# EAGLE board attinydevboard (EAGLE 9.6.2)
VERSION: 1.0b0
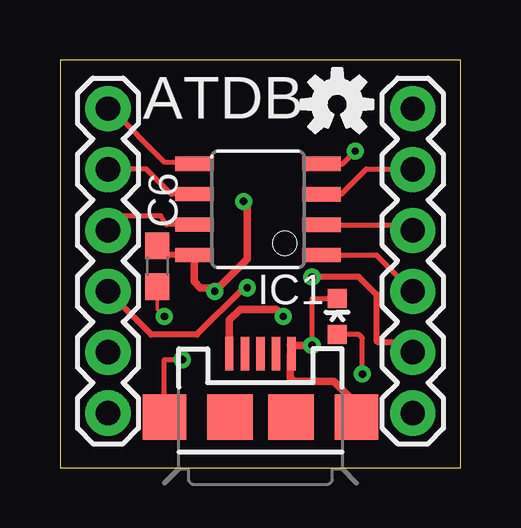
[diagram p0: board, top side]
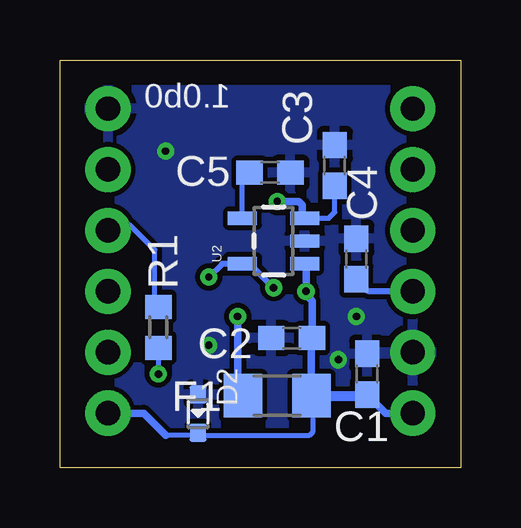
[diagram p1: board, bottom side, seen from below]

Size 16.7 x 17 mm. Coordinates in mm from the lower left corner, seen from the top.
Outline: 0,0 16.7,0 16.7,17 0,17 0,0
Copper layers (1*16): Top 0.035mm / dielectric 1.5mm / Bottom 0.035mm
Design rules "default *": minimum track width 10mil, minimum drill 24mil, track to track 8mil, track to pad 8mil, pad to pad 8mil, via to via 8mil, smd to smd 8mil, copper to edge 40mil, drill to drill 8mil, minimum pad ring 10mil, minimum via ring 8mil, stop-mask expansion 4mil, vias tented up to drill 13mil, thermal gap 10mil

## Footprints (pad centres in the part's own frame; a part is rotated, then mirrored left to right if it is on the bottom)
C0603 = smd 1.1 x 1: 1 -0.85,0; 2 0.85,0
SOD-523 = smd 0.762 x 0.7: + -0.8,0; - 0.8,0
R1206 = smd 1.6 x 1.803: 1 -1.422,0; 2 1.422,0
8S1 = smd 0.6 x 1.6: 1 -1.905,-2.654; 2 -0.645,-2.654; 3 0.625,-2.654; 4 1.895,-2.654; 5 1.905,2.654; 6 0.635,2.654; 7 -0.635,2.654; 8 -1.905,2.654
USB-MICROB = smd 0.35 x 1.4: D+ 0,2.65; D- -0.65,2.65; GND 1.3,2.65; ID 0.65,2.65; VBUS -1.3,2.65 | smd 1.8 x 1.9: MT1 -4,0; MT2 4,0 | smd 1.9 x 1.9: P$1 -1.27,0; P$2 1.27,0
1X06 = drill 1.016 pad 1.88: 1 0,0; 2 2.54,0; 3 5.08,0; 4 7.62,0; 5 10.16,0; 6 12.7,0
LED-0603 = smd 0.8 x 0.8: A 0,-0.75; C 0,0.75
R0603 = smd 1 x 1.1: 1 -0.85,0; 2 0.85,0
SOT23-5 = smd 0.55 x 1.2: 1 -0.95,-1.3; 2 0,-1.3; 3 0.95,-1.3; 4 0.95,1.3; 5 -0.95,1.3

## Placement (x,y rotation side)
C1  10uF  [C0603]  3.9,3.9 90 bottom
C2  100uF  [C0603]  7.05,5.4 180 bottom
C3  10uF  [C0603]  5.25,12.6 90 bottom
C4  10uF  [C0603]  4.35,8.7 90 bottom
C5  10uF  [C0603]  7.95,12.3 0 bottom
C6  10uF  [C0603]  4.05,8.4 270 top
D2  3.6V-150MW  [SOD-523]  10.95,2.25 270 bottom
F1  [R1206]  7.65,3 0 bottom
IC1  TINY13-20SSU  [8S1]  8.25,10.77 90 top
J1  USB-MICROB  [USB-MICROB]  8.35,2.1 0 top
J2  [1X06]  2,2.27 90 top
J3  [1X06]  14.7,2.27 90 top
LED1  [LED-0603]  11.55,6.3 0 top
R1  1K  [R0603]  12.6,5.85 270 bottom
U2  V_REG_LDOSMD  [SOT23-5]  7.8,9.45 90 bottom
U$2  OSHW-LOGOS  [OSHW-LOGO-S]  11.55,15.15 0 top

## Library data of the parts
C1-C6 = resistor
D2 = Seeed-OPL-Diode; MPN: BZX584C3V6
F1 R1 = adafruit
IC1 = atmel; MPN: ATTINY13-20SSU; OC_FARNELL: 1455133; OC_NEWARK: 58M3771
J1 = SparkFun-Connectors; PROD_ID: CONN-09505
J2 J3 LED1 U2 U$2 = SparkFun

## Nets
3.3V: C4.1 J2.3 J3.2 U2.5
5V: C1.1 C2.1 C3.1 C6.1 D2.- F1.2 IC1.8 J2.1 J3.1 U2.1 U2.3
ADC2: IC1.3 J3.5
ADC3: IC1.2 J3.4 R1.1
GND: C1.2 C2.2 C3.2 C4.2 C5.2 C6.2 D2.+ IC1.4 J1.GND J1.MT1 J1.MT2 J2.2 J3.6 LED1.C U2.2
MISO: IC1.6 J2.5
MOSI: IC1.5 J2.6
N$1: LED1.A R1.2
N$5: F1.1 J1.VBUS
N$12: C5.1 U2.4
RES: IC1.1 J3.3
SCK: IC1.7 J2.4

## Tracks (layer width: path | path; a pad name or v marks a point on that pad's centre or on a via)
3.3V  (via drill 0.3)
  Top 0.205: v7.8,7.5 7.65,7.5 | 2.15,7.2 J2.3
  Top 0.254: J3.2 14.06,5.25 13.2,5.25 13.2,7.2 12.45,7.95 v10.5,7.95 | 7.65,7.5 5.7,5.55 3.8,5.55 J2.3
  Bottom 0.205: U2.5 8.8,8.5
  Bottom 0.254: J2.3 3.85,7.35 C4.1 | U2.5 9.95,8.5 v10.5,7.95 | 8.8,8.5 v7.8,7.5
5V  (via drill 0.3)
  Top 0.205: 6.3,7.5 v6.45,7.35 | 7.8,10.95 v7.65,11.1
  Top 0.254: IC1.8 4.05,8.87 C6.1
  Top 0.305: IC1.8 5.6,7.75 5.85,7.5 6.3,7.5 | 7.8,10.95 7.8,8.7 v6.45,7.35
  Bottom 0.152: D2.- 10.95,1.35
  Bottom 0.205: 3.95,3 C1.1 | 6.23,5.37 C2.1 | 12.3,1.35 10.95,1.35 6.3,1.35 6.15,1.5 6.15,2.92 F1.2 | 6.45,8.45 U2.1 | C3.1 5.25,10.65 5.5,10.4 U2.3 6.6,10.5
  Bottom 0.305: J2.1 3.12,2.27 C1.1 | F1.2 6.23,5.37 | J3.1 13.22,2.27 12.3,1.35 | C2.1 6.2,6.95 6.45,7.2 v6.45,7.35 6.45,8.45 | v7.65,11.1 6.75,11.1 6.6,10.95 6.6,10.5
  Bottom 0.406: F1.2 3.95,3
ADC2
  Top 0.205: IC1.3 11.7,11.39 12.75,12.45 14.48,12.45 J3.5
ADC3
  Top 0.205: IC1.2 14.27,10.12 J3.4
  Bottom 0.205: R1.1 12.75,6.7 12.75,9.07 13.8,10.12 14.46,10.12 J3.4
GND  (via drill 0.3)
  Top 0.152: C6.2 4.05,6.6 v4.35,6.3
  Top 0.205: IC1.4 11.77,12.66 v12.3,13.2 | v5.1,4.5 4.35,4.5 J1.MT1 | 9.6,4.7 J1.GND 9.6,4.8 9.6,5.1 | v10.5,5.1 10.5,7.05 LED1.C
  Top 0.305: J1.MT2 12.25,2.75 11.4,3.6 9.75,3.6 9.6,3.75 9.6,4.7 | v10.5,5.1 9.6,5.1
  pour Bottom: -0.3,21.3 -0.3,-0.6 18.9,-0.6 18.9,22.5 -0.3,22.5
MISO
  Top 0.205: IC1.6 4.64,11.4 3.6,12.45 2.02,12.45 J2.5
MOSI
  Top 0.205: J2.6 2.13,14.97 4.35,12.75 5.52,12.75 IC1.5
N$1  (via drill 0.3)
  Top 0.205: v12.6,3.9 12.6,5.4 12.45,5.55 LED1.A
  Bottom 0.205: R1.2 v12.6,3.9
N$5  (via drill 0.3)
  Top 0.305: v9.3,6.3 9,6.6 7.5,6.6 7.05,6.15 J1.VBUS
  Bottom 0.205: 9.3,3.23 F1.1
  Bottom 0.305: v9.3,6.3 9.3,3.23
N$12
  Bottom 0.205: U2.4 9.1,12 C5.1
RES
  Top 0.205: IC1.1 13.19,8.87 J3.3
SCK
  Top 0.205: IC1.7 4.43,10.13 4.2,10.5 1.99,10.5 J2.4

## Text on the board
tPlace: ATDB